# Allegro board ETDS_PCB_AN_EXTENDED.brd
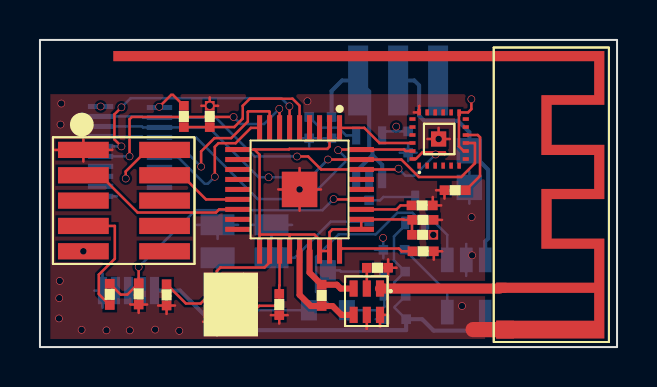
[diagram p0: board, top side]
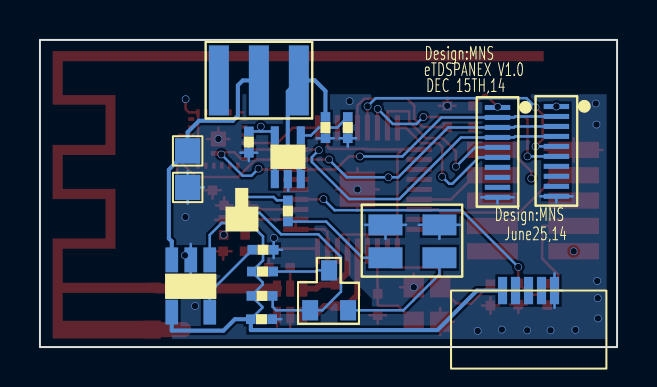
[diagram p1: board, bottom side, seen from below]

Outline 28.88 x 15.39 mm; copper layers: TOP, GND, VCC3V, BOTTOM. Coordinates in mm from the lower left corner of the outline.
Outline path: rectangle 0,0 28.88,15.39

## Design rules (mm)
nets with their own width: min track width 0.305; nets N11204643 N11204651
nets with their own width: min track width 0.508; nets ANT_OUT

## Placement (name value [footprint] x y rotation side)
C2  10nF  [C0402]  14.16 11.96 270 bottom
C3  1uF  [C0402]  19.11 11.24 270 bottom
C4  22pF  [C0402]  11.29 3.1 270 top
C5  22pF  [C0402]  5.65 3.58 270 top
C7  1uF  [C0402]  18.16 6.41 0 top
C8  1uF  [C0402]  18.2 5.69 0 top
C11  22pF  [C0402]  15.93 3.29 0 top
C32  1uF  [C0402]  18.76 0.71 180 bottom
C39  1uF  [C0402]  15.28 11.96 270 bottom
C40  1nF  [C0402]  4.25 3.63 270 top
C42  0.1uF  [C0402]  21.74 8.55 180 top
H5  Header1X1  [H1]  22.22 9.09 180 bottom
H6  Header5X1  [MICROUSB]  8.33 3.59 270 bottom
H8  Header1X1  [H1]  22.22 7.26 180 bottom
H10  Header5X2  [H10]  4.2 6.96 180 bottom
H11  Header5X2  [H10]  7.15 6.91 180 bottom
H12  Header1X1  [ANT_W_MGH]  24.03 6.86 0 top
J2  CON5  [H5X2]  0.65 4.17 0 top
L1  10nH  [L0402]  14.43 1.73 90 top
L2  BEAD  [L0402]  20.02 5.96 180 top
LED1  APBL3025  [LEDAP]  12.78 3.53 180 bottom
Q1  DMP22D6UT  [MOS_DMP]  19.6 5.79 180 bottom
Q2  DMN5L06K  [MOS_DMN]  15.96 1.17 180 bottom
R4  56k  [R0402]  18.31 4.47 0 top
R28  10k  [R0402]  18.63 2.24 180 bottom
R29  8k  [R0402]  16.88 4.11 0 bottom
R40  3.9k  [R0402]  16.14 5.96 90 bottom
R41  100k  [R0402]  7.53 10.69 90 top
R42  200k  [R0402]  8.17 12.42 270 top
R43  1k  [R0402]  18.58 4.55 180 bottom
R44  2.7k  [R0402]  3.82 1.78 90 top
S1  CSS-1210B  [SWITCH]  20.59 15.29 270 bottom
U1  -  [TPS71730]  17.48 7.84 180 bottom
U2  -  [LTC4054]  19.93 5.11 0 bottom
U6  balunn  [BALUNN]  15.27 1.05 0 top
U7  1  [CC2510]  12.99 7.9 270 top
U8  -  [MPU9250]  19.98 10.43 90 top
Y1  26MHz  [CRYST_26M]  11.06 0.48 90 top

## Library data of the parts
C2 C3 C11 C39 = C: room: 1
C4 C5 C7 C8 C32 C40 C42 = C
H5 = Header1X1_2: room: 1
H6 = Header1X1_0
H8 = Header1X1_1: room: 1
H10 H11 = Header7X1_0
H12 = Header1X1_0: room: 1
J2 = CON5_0
L1 L2 = INDUCTOR
LED1 = BRPG1204_0
Q1 = MOSFET P_0
Q2 = DMN5L06K
R4 R28 R29 R40-R44 = R
S1 = SW_0: room: 1
U1 = TPS71730_0: room: 1
U2 = LTC4054_0
U6 = balunn
U7 = cc2510f32rspr_1
U8 = MPU9250_1
Y1 = CRYSTAL_2

## Footprints (pads in the part's own frame, mm; a bottom-side part is the same pattern mirrored in y, then rotated)
ANT_W_MGH
  rect 0.508x0.508 smd: 1(-0.94,-3.886)
  rect 0.889x0.889 smd: 2(-0.749,-5.982)
BALUNN
  rect 0.406x0.813 smd: 1(1.753,1.88) 2(1.092,1.88) 3(0.432,1.88) 4(0.432,0.559) 5(1.092,0.559) 6(1.753,0.559)
C0402
  rect 0.483x0.483 smd: 1(0.432,0.686) 2(1.499,0.686)
CC2510
  rect 1.27x0.254 smd: 1(-3.086,2) 2(-3.086,1.5) 3(-3.086,1) 4(-3.086,0.5) 5(-3.086,0) 6(-3.086,-0.5) 7(-3.086,-1) 8(-3.086,-1.5) 9(-3.086,-2) 19(3.086,-2) 20(3.086,-1.5) 21(3.086,-1) 22(3.086,-0.5) 23(3.086,0) 24(3.086,0.5) 25(3.086,1) 26(3.086,1.5) 27(3.086,2)
  rect 0.254x1.27 smd: 10(-2,-3.086) 11(-1.5,-3.086) 12(-1,-3.086) 13(-0.5,-3.086) 14(0,-3.086) 15(0.5,-3.086) 16(1,-3.086) 17(1.5,-3.086) 18(2,-3.086) 28(2,3.086) 29(1.5,3.086) 30(1,3.086) 31(0.5,3.086) 32(0,3.086) 33(-0.5,3.086) 34(-1,3.086) 35(-1.5,3.086) 36(-2,3.086)
  rect 1.778x1.778 smd: 37(0,0)
CRYST_26M
  rect 1.016x1.016 smd: 1(0.787,0.889) 2(2.515,2.21) 3(2.515,0.889) 4(0.787,2.21)
H1
  rect 1.27x1.27 smd: 1(0.737,0.737)
H5X2
  rect 2.54x0.813 smd: 1(1.524,5.715) 2(5.588,5.715) 3(1.524,4.445) 4(5.588,4.445) 5(1.524,3.175) 6(5.588,3.175) 7(1.524,1.905) 8(5.588,1.905) 9(1.524,0.635) 10(5.588,0.635)
H10
  rect 1.27x0.254 smd: 1(1.168,5.097) 2(1.168,4.597) 3(1.168,4.097) 4(1.168,3.596) 5(1.168,3.096) 6(1.168,2.596) 7(1.168,2.096) 8(1.168,1.596) 9(1.168,1.096) 10(1.168,0.596)
L0402
  rect 0.483x0.483 smd: 1(0.33,0.33) 2(1.397,0.33)
LEDAP
  rect 1.7x1.05 smd: 1(1.187,0.945) 2(1.187,2.595) 3(3.887,0.945) 4(3.887,2.595)
LTC4054
  rect 0.635x1.245 smd: 1(0.457,0.737) 2(1.407,0.737) 3(2.357,0.737) 4(2.357,3.353) 5(0.457,3.353)
MICROUSB
  rect 1.372x0.457 smd: 1(0.762,2.601) 2(0.762,3.251) 3(0.762,3.901) 4(0.762,4.552) 5(0.762,5.202)
MOS_DMN
  rect 0.8x1.016 smd: 1(0.605,0.676) 2(2.504,0.676) 3(1.554,2.676)
MOS_DMP
  rect 0.4x0.635 smd: 1(0.32,0.43) 2(1.32,0.43) 3(0.82,1.73)
MPU9250
  rect 0.305x0.178 smd: 1(-1.333,1) 2(-1.333,0.6) 3(-1.333,0.2) 4(-1.333,-0.2) 5(-1.333,-0.6) 6(-1.333,-1) 13(1.333,-1) 14(1.333,-0.6) 15(1.333,-0.2) 16(1.333,0.2) 17(1.333,0.6) 18(1.333,1)
  rect 0.178x0.305 smd: 7(-1,-1.333) 8(-0.6,-1.333) 9(-0.2,-1.333) 10(0.2,-1.333) 11(0.6,-1.333) 12(1,-1.333) 19(1,1.333) 20(0.6,1.333) 21(0.2,1.333) 22(-0.2,1.333) 23(-0.6,1.333) 24(-1,1.333)
  rect 0.762x0.762 smd: 25(0,0.025)
R0402
  rect 0.483x0.483 smd: 1(0.33,0.33) 2(1.397,0.33)
SWITCH
  rect 3.505x1 smd: 1(1.93,4.661) 2(1.93,2.661) 3(1.93,0.661)
TPS71730
  rect 0.406x0.914 smd: 1(0.349,0.584) 2(0.999,0.584) 3(1.649,0.584) 4(1.649,2.769) 5(0.349,2.769)

## Nets
GND: C2.2 C3.2 C4.2 C5.2 C7.2 C8.2 C11.2 C32.2 C39.2 C40.2 C42.2 H6.5(GND) H8.1 H10.10 H11.10 H12.2 J2.1 LED1.2(-1) LED1.4(-2) R4.2 R42.1 R43.2 U1.2(GND) U2.2(GND) U6.5(GND2) U6.6(GND3) U7.37(GND EXPOSED) U8.18(GND) U8.25 Y1.3(GND#3) Y1.4(GND#4)
VBAT: C39.1 S1.1(R) U1.1(IN) U1.3(EN)
VCC1: C8.1 L2.2 U7.2(DVDD#2) U7.10(DVDD#10) U7.19(AVDD#19) U7.22(AVDD#22) U7.25(AVDD#25) U7.26(AVDD#26) U7.28(GUARD) U7.29(AVDD_DREG)
VCC3V: C3.1 H10.1 H11.1 J2.2 J2.9 L2.1 R41.2 U1.5(OUT) U8.8(VDDIO) U8.13(VDD)
ANT_OUT: H12.1 U6.1(UBP)
BAT: H5.1 S1.2(COM) U2.3(BAT)
RESET_N: C40.1 R44.2 U7.31(RESET_N)
SPI_MISO: H10.3 H11.3 U7.35(P1_4) U8.9(AD0/SDO)
SPI_MOSI: H10.2 H11.2 U7.34(P1_5) U8.24(SDA/SDI)
SPI_NCS_S1: H10.5 U7.6(P0_1)
SPI_NCS_S2: H10.6 U7.7(P0_2)
SPI_NCS_S3: H11.5 U7.8(P0_3)
SPI_NCS_S4: H11.6 U7.9(P0_4)
SPI_NCS_S5: U7.1(P1_2) U8.22(NCS)
SPI_SCK: H10.4 H11.4 U7.36(P1_3) U8.23(SCL/SCLK)
V_5V: C32.1 H6.1(5V) Q1.2(DRAIN) R28.1 R29.2 U2.4(VCC)
N11204639: C11.1 U6.2(GND1)
N11204643: L1.2 U6.3(BP1) U7.24(RF_N)
N11204651: L1.1 U6.4(BP2) U7.23(RF_P)
N11204711: R41.1 R42.2 U7.5(P0_0)
N11204883: C7.1 U7.30(DCOUPL)
N11204935: R4.1 U7.27(RBIAS)
N11204991: C4.1 U7.21(XOSC_Q1) Y1.1
N11204999: C5.1 U7.20(XOSC_Q2) Y1.2
N11205295: J2.7 R44.1
N11205307: J2.3 U7.16(P2_2)
N11205311: J2.4 U7.15(P2_1)
N11205551: C42.1 U8.10(REGOUT)
N11205777: C2.1 U1.4(NR/FB)
N11206057: Q2.3(D) R29.1
N11206071: Q1.1(GATE) Q2.1(G) R28.2 U2.1(\\C\H\R\G)
N11206115: LED1.3(GREEN) Q2.2(S)
N11206119: LED1.1(RED) R40.1
N11206131: Q1.3(SOURCE) R40.2
N11206245: R43.1 U2.5(PROG)

Pads without a net: H6 2 3 4; H10 7 8 9; H11 7 8 9; J2 5 6 8 10; S1 3; U7 3 4 11 12 13 14 17 18 32 33; U8 1 2 3 4 5 6 7 11 12 14 15 16 17 19 20 21

## Via types
v1: diameter 0.381, hole 0.33, TOP to BOTTOM, 42 vias

## Routing (per net, layer and track width the routed paths; a pad name or vN(x,y) marks a point on that pad's centre or on a via; arc(x,y) is an arc through that point)
GND: length 52.3
  TOP w0.127: C5.2 6.34,2.5 ; C5.2 6.34,1.66 ; C5.2 6.76,2.08 ; C5.2 5.92,2.08 ; R4.2 20.13,4.8 ; R4.2 19.29,4.8 ; R4.2 19.71,4.38 ; Y1.4 8.85,1.96 ; Y1.4 8.85,0.58 ; Y1.4 8.17,1.27 ; v1(8.5,12.09) 8.5,12.51 ; v1(8.5,12.09) 8.92,12.09 ; v1(8.5,12.09) 8.08,12.09 ; 20.12,6.38 C8.2 19.28,6.38 ; v1(12.99,7.9) 12.99,8.97 ; v1(12.99,7.9) 12.99,6.83 ; v1(12.99,7.9) 14.06,7.9 ; v1(12.99,7.9) 11.92,7.9 ; C42.2 20.66,7.86 ; C42.2 20.24,7.44 ; C42.2 19.82,7.86 ; C7.2 20.08,7.1 ; C7.2 19.24,7.1 ; C7.2 19.66,7.52 ; 11.98,1.18 C4.2 ; C4.2 11.56,1.6 ; C4.2 12.4,1.6 ; 10.17,2.31 v1(10.17,3) ; v1(10.17,3) 10.17,3.68 ; v1(10.17,3) 10.86,3 ; C11.2 17.84,3.98 ; C11.2 17.42,3.56 ; C11.2 17.42,4.39 ; C11.2 17,3.98 ; J2.1 3.62,9.88 ; J2.1 0.72,9.88 ; J2.1 2.17,9.3 ; J2.1 2.17,10.47 ; U6.5 16.36,0.91 16.37,0.9 ; v1(19.95,10.43) 19.95,10.99 ; v1(19.95,10.43) 20.51,10.43 ; v1(19.95,10.43) 19.39,10.43 ; 17.4,1.61 U6.6 17.02,1.03 ; 18.98,12.09 U8.18 18.71,11.76 ; C40.2 4.94,2.55 ; C40.2 4.94,1.71 ; C40.2 4.52,2.13 ; C40.2 5.36,2.13
  TOP w0.762: H12.2 21.68,0.88
  BOTTOM w0.127: H10.10 3.85,7.56 ; H10.10 2.22,7.56 ; H10.10 3.04,7.25 ; 2.72,2.83 H6.5 ; H6.5 3.13,1.97 ; H6.5 3.13,3.7 ; 18.01,9.74 C3.2 ; C3.2 18.43,9.32 ; C3.2 18.43,10.16 ; C3.2 18.85,9.74 ; 16.76,4.88 R43.2 ; R43.2 17.18,4.46 ; R43.2 17.18,5.3 ; 5.17,7.5 H11.10 ; H11.10 6.8,7.5 ; H11.10 5.98,7.2 ; 8.89,5.42 LED1.4 ; LED1.4 9.92,6.13 ; LED1.4 7.86,6.13 ; H8.1 21.49,8.81 ; H8.1 20.68,8 ; H8.1 21.49,7.19 ; C2.2 13.47,10.88 ; C2.2 13.06,10.46 ; C2.2 13.47,10.05 ; C2.2 13.89,10.46 ; C32.2 16.8,1.4 ; U1.2 16.46,8.4 16.46,7.82 ; 10.56,6.13 LED1.2 ; LED1.2 12.62,6.13 ; LED1.2 11.59,5.42 ; 21.33,3.57 U2.2 21.33,5.17 ; 14.17,10.46 C39.2 15.01,10.46
  vias: v1(1.03,11.15) v1(0.99,3.31) v1(0.97,2.45) v1(0.95,1.44) v1(1.07,12.2) v1(2.08,0.86) v1(3.33,0.84) v1(4.5,0.84) v1(5.77,0.88) v1(6.97,0.81) v1(13.39,12.32) v1(17.17,5.47) v1(21.12,2.06) v1(21.6,6.52) v1(21.63,4.6)
VBAT: length 9.8
  BOTTOM w0.203: 16.64,9.61 17.13,9.13 U1.1 ; 16.64,9.61 15.83,8.8 U1.3 ; 16.64,9.61 16.64,9.82 16.48,9.98 16.48,12.81 15.93,13.36 15.12,13.36 14.59,12.83 C39.1
VCC1: length 22.2
  TOP w0.127: 10.73,9.9 10.99,9.64 10.99,5.64 ; 10.73,9.9 U7.10 ; 10.73,9.9 10.73,9.91 12.46,9.91 12.48,9.93 14.38,9.93 14.49,10.05 U7.2 ; 12.49,5.64 U7.22 ; 12.49,5.64 13.74,5.64 13.99,5.38 U7.25 U7.26 14.49,5.75 14.64,5.9 U7.28 U7.29 18.18,6.4 18.2,6.38 18.62,6.38 ; 12.49,5.64 10.99,5.64 ; 18.62,6.38 L2.2 ; 18.62,6.38 C8.1 ; 10.99,5.64 U7.19
VCC3V: length 9.4
  TOP w0.127: U8.8 21.2,9.83 20.97,10.06 20.97,11.59 20.98,11.6 U8.13 21.42,11.76 21.59,11.93 v1(21.59,12.42) ; v1(5.97,12.04) 6.57,12.64 6.65,12.64 R41.2 ; J2.2 5.37,9.88 4.29,8.8 v1(4.29,8.45)
  BOTTOM w0.127: U1.5 17.33,10.81 17.83,10.81 ; v1(5.97,12.04) 5.97,12.02 H11.1 ; C3.1 17.83,10.81 ; 17.83,10.81 v1(17.83,11.05)
  vias: v1(2.17,4.8) v1(3.04,12.06) v1(19.69,5.63)
ANT_OUT: length 6
  TOP w0.508: U6.1 23.01,2.93
BAT: length 12.4
  BOTTOM w0.203: U2.3 22.28,5.3 22.43,5.44 22.43,8.89 H5.1 21.49,10.77 20.92,11.34 19.23,11.34 18.97,11.6 18.97,13.12 18.73,13.36 17.93,13.36
RESET_N: length 15.3
  TOP w0.127: v1(14.69,7.42) 14.71,7.4 U7.31 ; R44.2 4.04,2.63 4.37,2.63 C40.1 v1(4.94,4.01)
  BOTTOM w0.127: v1(14.69,7.42) 14.14,6.86 7.79,6.86 v1(4.94,4.01)
SPI_MISO: length 22.3
  TOP w0.127: v1(14.41,9.4) U7.35 18.09,9.4 18.96,8.52 21.08,8.52 21.77,9.21 21.77,10.23 U8.9
  BOTTOM w0.127: v1(14.41,9.4) 13.52,8.51 v1(11.44,8.51) 10.95,8.51 8.45,11.01 H11.3 5.16,11.01 5.11,11.06 H10.3
SPI_MOSI: length 20.8
  TOP w0.127: v1(12.87,9.55) 13.42,9.55 14.07,8.9 U7.34 17.9,8.9 v1(17.95,8.94) ; v1(19.8,9.65) 20.25,9.65 20.27,9.66 20.27,9.75 20.25,9.76 19.15,9.76 18.81,9.43 U8.24
  BOTTOM w0.127: H10.2 5.11,11.56 5.16,11.51 H11.2 8.79,11.51 10.74,9.55 v1(12.87,9.55) ; v1(19.8,9.65) 18.74,8.59 18.3,8.59 v1(17.95,8.94)
SPI_NCS_S1: length 13.1
  TOP w0.127: U7.6 12.49,12.06 v1(12.48,12.06) ; v1(4.08,10.06) 3.73,10.41 3.73,11.66 v1(4.08,12.01)
  BOTTOM w0.127: H10.5 v1(4.08,10.06) ; v1(12.48,12.06) 12.08,12.47 4.53,12.47 v1(4.08,12.01)
SPI_NCS_S2: length 12.3
  TOP w0.127: U7.7 11.99,11.92 v1(11.98,11.94) ; v1(4.48,9.56) 4.48,11.42 4.6,11.53 v1(9.69,11.53)
  BOTTOM w0.127: v1(11.98,11.94) 11.22,11.18 10.04,11.18 v1(9.69,11.53) ; H10.6 v1(4.48,9.56)
SPI_NCS_S3: length 8.6
  TOP w0.127: U7.8 11.49,11.79 11.47,11.81 10.43,11.81 10.4,11.79 10.4,11.3 9.57,10.47 8.73,10.47 8.06,9.8 v1(8.06,9.04)
  BOTTOM w0.127: H11.5 7.1,10.01 v1(8.06,9.04)
SPI_NCS_S4: length 7.6
  TOP w0.127: v1(8.75,8.53) 8.75,10.03 8.93,10.22 9.79,10.22 10.56,10.99 U7.9
  BOTTOM w0.127: v1(8.75,8.53) 8.4,8.18 8.24,8.18 6.92,9.5 H11.6
SPI_NCS_S5: length 4
  TOP w0.127: U7.1 16.23,10.99 16.99,10.23 U8.22
SPI_SCK: length 18.8
  TOP w0.127: U8.23 18.3,9.83 18.23,9.9 U7.36 14.95,9.9 v1(14.92,9.87)
  BOTTOM w0.127: H10.4 5.11,10.56 5.16,10.51 H11.4 7.81,10.51 10.9,7.42 13.41,7.42 15.27,9.28 15.27,9.52 v1(14.92,9.87)
V_5V: length 25.3
  BOTTOM w0.127: C32.1 17.75,1.97 17.75,2.02 R28.1 17.73,3.14 17.73,3.24 R29.2 17.72,4.34 17.72,5.54 18.28,6.1 Q1.2
  BOTTOM w0.203: U2.4 22.28,0.83 19.7,0.83 19.13,1.4 C32.1 18.33,0.85 8.99,0.85 7.01,2.83 H6.1
N11204639: length 1
  TOP w0.127: C11.1 U6.2
N11204643: length 3.6
  TOP w0.305: U6.3 15.05,2.93 14.86,3.12 L1.2 13.49,3.73 U7.24
N11204651: length 5.3
  TOP w0.305: U7.23 12.99,2.62 13.55,2.06 L1.1 14.64,2.06 15.09,1.61 U6.4
N11204711: length 8
  TOP w0.127: R41.1 R42.2 9.72,11.02 10.15,11.45 10.15,12.09 10.5,12.45 12.64,12.45 12.99,12.1 U7.5
N11204883: length 2.6
  TOP w0.127: U7.30 17.85,6.9 18.05,7.1 C7.1
N11204935: length 3.8
  TOP w0.127: U7.27 15.12,4.94 17.96,4.94 18.1,4.8 R4.1
N11204991: length 4.9
  TOP w0.127: U7.21 11.99,3.1 11.98,3.08 C4.1 11.98,2.12 11.93,2.07 10.97,2.07 Y1.1
N11204999: length 7.5
  TOP w0.127: U7.20 11.49,4.24 11.24,3.99 9.03,3.99 8.85,3.81 Y1.2 8.04,2.18 7.3,2.18 C5.1
N11205295: length 6.1
  TOP w0.127: J2.7 3.75,6.07 3.75,4.43 2.95,3.63 2.95,2.65 R44.1
N11205307: length 8.6
  TOP w0.127: U7.16 8.97,6.9 8.81,6.74 4.89,6.74 3.02,8.61 J2.3
N11205311: length 4.2
  TOP w0.127: U7.15 8.31,7.4 7.1,8.61 J2.4
N11205551: length 3.7
  TOP w0.127: U8.10 21.91,10.63 22.02,10.51 22.02,8.57 C42.1
N11205777: length 2.7
  BOTTOM w0.127: U1.4 15.32,10.6 14.92,11 14.01,11 C2.1
N11206057: length 2.8
  BOTTOM w0.127: R29.1 15.06,3.78 15,3.84 Q2.3
N11206071: length 15.4
  BOTTOM w0.127: U2.1 20.38,5.62 19.78,6.22 Q1.1 19.15,6.22 18.64,6.73 17.89,6.73 16.81,5.65 14.95,5.65 13.82,4.52 13.82,2.77 14.75,1.84 Q2.1 17.06,1.84 17.23,2.02 R28.2
N11206115: length 6.1
  BOTTOM w0.127: Q2.2 10.69,1.84 8.89,3.65 LED1.3
N11206119: length 5.6
  BOTTOM w0.127: R40.1 14.55,6.29 12.74,4.48 LED1.1
N11206131: length 2.4
  BOTTOM w0.127: R40.2 17.02,7.35 17.19,7.52 Q1.3
N11206245: length 4
  BOTTOM w0.127: R43.1 20.38,2.74 U2.5

## Copper pours and planes (outline as drawn; the poured copper is in the pictures)
GND on TOP: 0.52,12.67 0.52,0.41 22.28,0.41 22.28,12.67 ; 6 cut-outs
GND on BOTTOM: 0.52,12.67 0.52,0.41 22.28,0.41 22.28,12.67 ; 9 cut-outs
GND on GND: 0.52,12.67 0.52,0.41 22.28,0.41 22.28,12.67
VCC3V on VCC3V: 0.52,12.62 0.52,12.67 22.28,12.67 22.28,0.41 0.52,0.41
ANT_OUT on TOP (solid shape): 28.24,12.14 25.6,12.14 25.6,10.13 28.24,10.13 28.24,7.42 25.6,7.42 25.6,5.44 28.24,5.44 28.24,0.43 22.83,0.43 22.83,1.32 27.74,1.32 27.74,2.72 22.83,2.72 22.83,3.23 27.74,3.23 27.74,4.93 25.1,4.93 25.1,7.92 27.74,7.92 27.74,9.63 25.1,9.63 25.1,12.62 27.74,12.62 27.74,14.33 3.67,14.33 3.67,14.83 28.24,14.83

## Text on the board
Ref Des/Silkscreen Bottom: June25,14 | Design:MNS | DEC 15TH,14 | eTDSPANEX V1.0
